# Altium PCB 24VRegulator.PcbDoc
Units mil, origin at the board's own origin, x right, y up, seen from the top; angles counter-clockwise.
Board outline 5100 x 2270 mil, 2 copper layers (Top Layer, Bottom Layer); 10 components, 7 nets, 37 pads, 4 vias.
Unrouted connection lines stored in the file: 5.
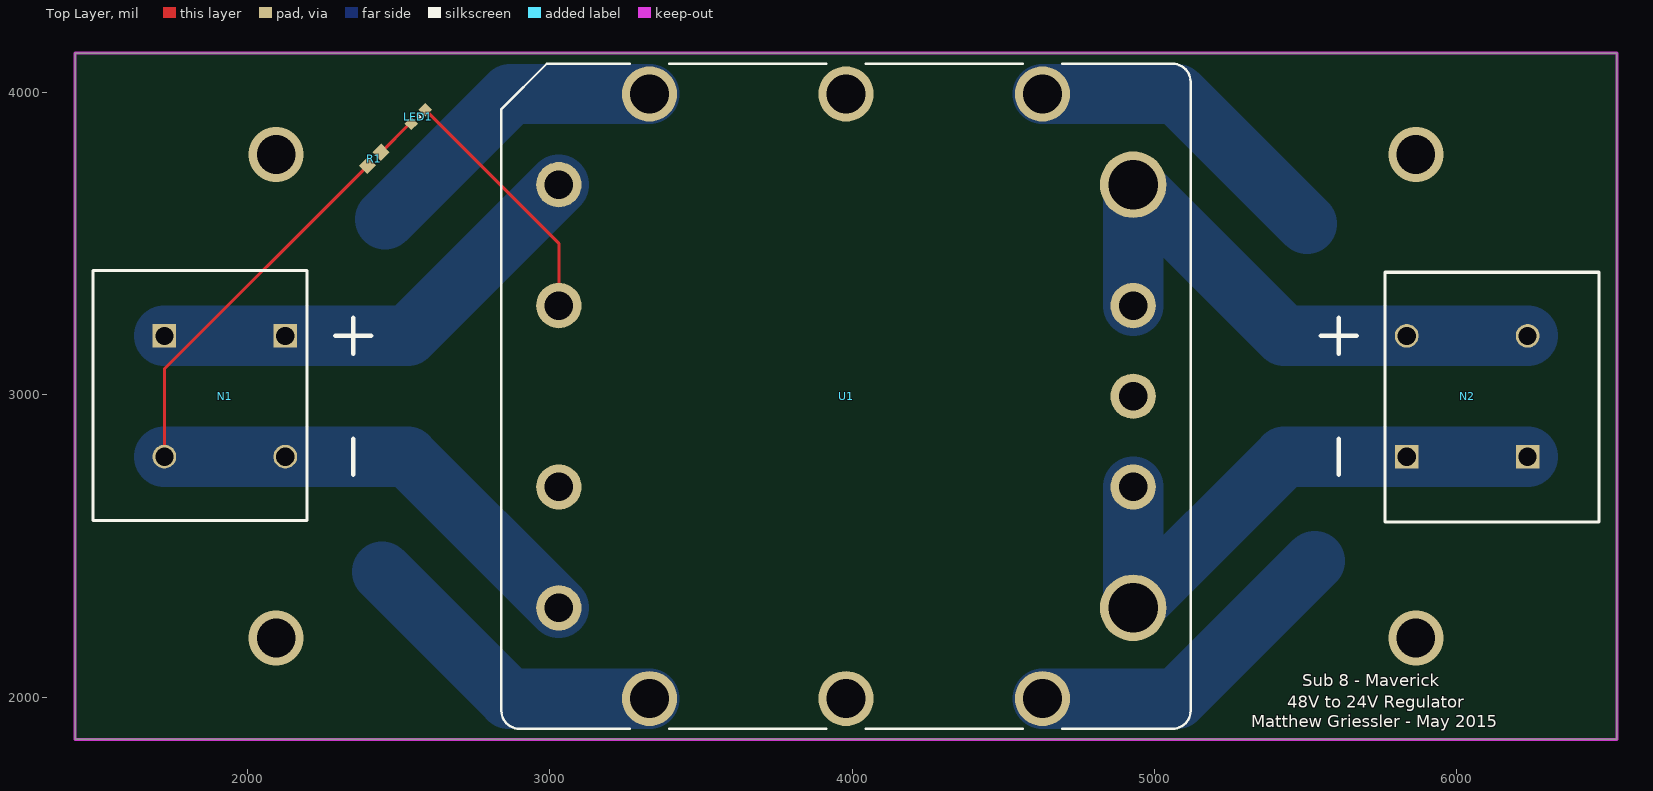
[diagram p0: Top Layer view]
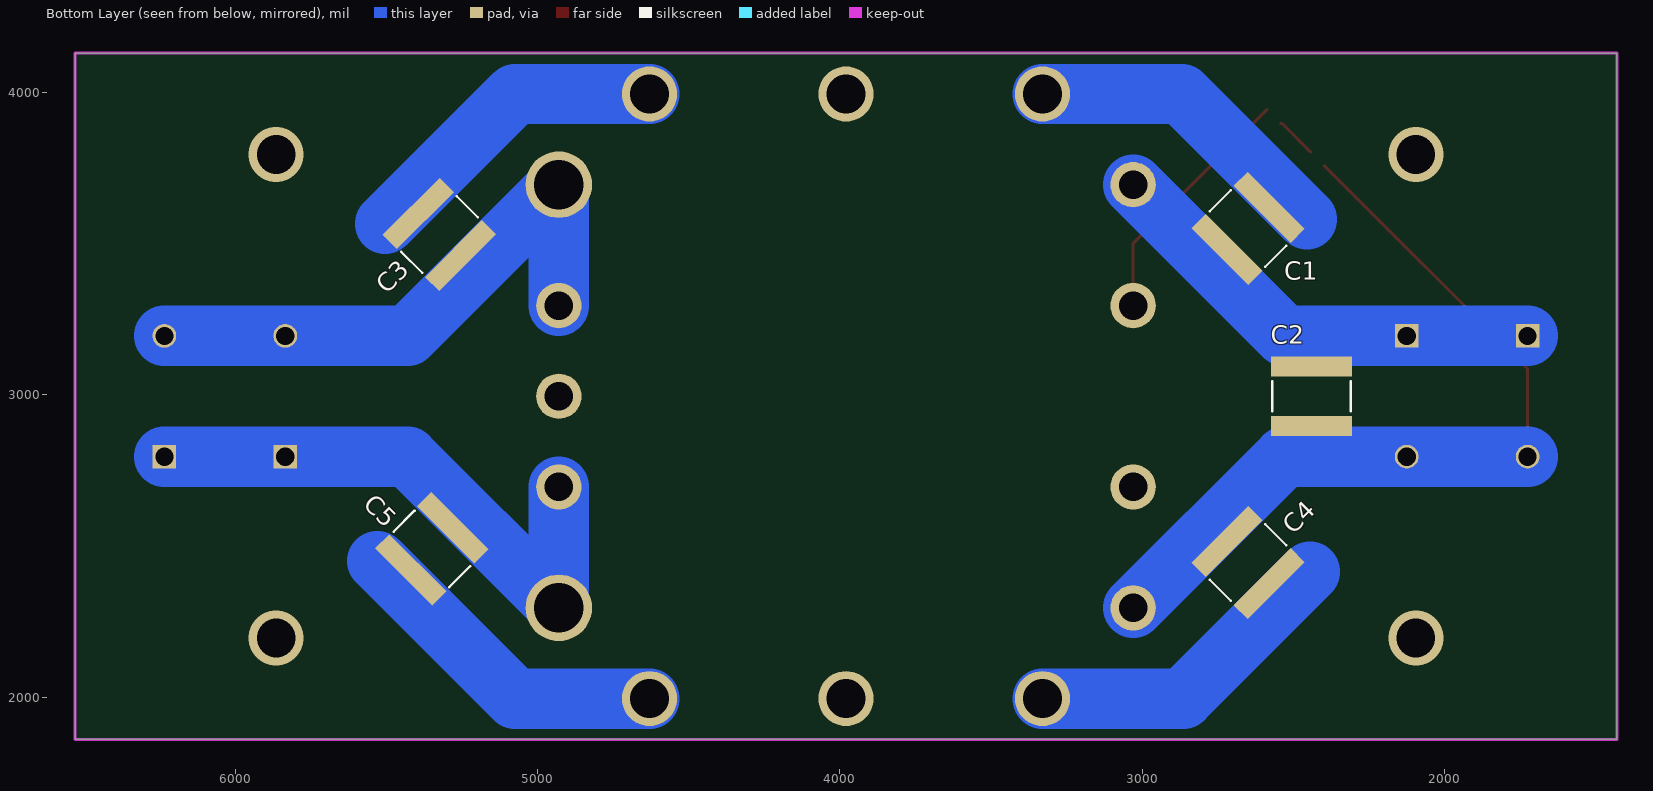
[diagram p1: Bottom Layer view, seen from below]
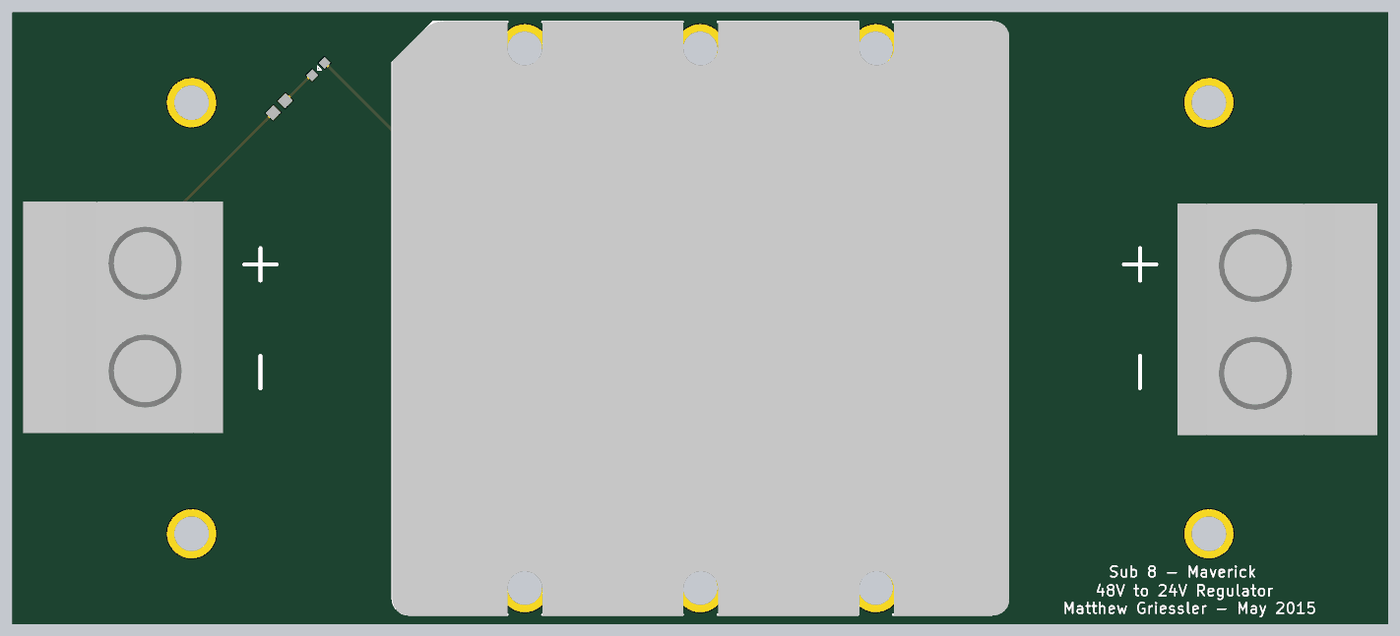
[diagram p2: 3D render of the assembled board from above, using the file's embedded part models]

## Layer stack, top to bottom
Top Solder: solder mask 0.4, Solder Resist, Dk 3.5
Top Layer: signal copper 1.4
Dielectric 1: dielectric 12.6, FR-4, Dk 4.8
Bottom Layer: signal copper 1.4
Bottom Solder: solder mask 0.4, Solder Resist, Dk 3.5

## Board outline
1430,1860 6530,1860 6530,4130 1430,4130

## Design rules (kind name [scope] priority, off if disabled: settings)
Clearance [All] p1: gap=10
Height [All] p1: minheight=0 maxheight=10000 prefheight=500
HoleSize [All] p1: absolutevalues=TRUE maxlimit=300 minlimit=1 maxpercent=80.000 minpercent=20.000
PolygonConnect [All] p1: connectstyle=Relief reliefconductorwidth=10 reliefentries=4 polygonreliefangle="90 Angle" airgapwidth=10
RoutingVias [All] p1: holewidth=28 width=50 viastyle="Through Hole" minholewidth=28 minwidth=50 maxholewidth=28 maxwidth=50
SilkToSolderMaskClearance [IsPad] p1: minsilkscreentomaskgap=5 clearancetoexposedcopper=TRUE
SolderMaskExpansion [All] p1: expansion=4
Width [All] p1: maxlimit=200 minlimit=10 preferedwidth=10
27 further rules are at their usual default settings.

## Components (designator, comment, footprint, x,y, rotation, side; value= is the part's Value field where it differs from the comment)
C1 "Cap" CAP2225 2650,3550 r135 bottom
C2 "Cap" CAP2225 2440,2995 r270 bottom
C3 "Cap" CAP2225 5325,3530 r45 bottom
C4 "Cap" CAP2225 2650,2445 r225 bottom
C5 "Cap" CAP2225 5350,2490 r315 bottom
LED1 "LED" LED0603 2565,3920 r225 top
N1 "0399700102" MOLEX-TERMINAL-1X2-EUROSTYLE-60A 1725,3195 r270 top
N2 "0399700102" MOLEX-TERMINAL-1x2-EUROSTYLE-60A_Reversed 6235,2795 r90 top
R1 "Res" RES0603 2420,3780 r225 top
U1 "48V->24V" FASTRAK_MINI_ONBOARD_MOUNT 3980,2995 r0 top

## Footprints (in the part's own frame and the unit in brackets; to place one, negate y for a bottom-side part, rotate by r counter-clockwise, add the part's x,y. Pads: shape width x height; smd on the part's side, far side on the other; paste and mask are expansions set on the pad)
CAP2225 [mm] "Chip Capacitor, 2-Leads, Body 5.60x6.40mm, IPC Medium Density"
  rect 1.7x6.8 smd: 1(-2.5,0) 2(2.5,0)
  silkscreen extent -1.25,-3.3 1.25,3.3, body extent -3,-3.4 3,3.4, height 1.8
FASTRAK_MINI_ONBOARD_MOUNT [mil]
  round 182 hole 128.5: 0(-650,-1000) 0(-650,1000) 0(0,-1000) 0(0,1000) 0(650,-1000) 0(650,1000)
  round 150 hole 94: 1(-950,700) 2(-950,300) 3(-950,-300) 4(-950,-700) 6(950,-300) 7(950,0) 8(950,300)
  round 220 hole 164: 5(950,-700) 9(950,700)
  silkscreen extent -1140,-1100 1140,1100, body extent -1141,-1103 1145,1103, height 434
LED0603 [mm] "Chip LED, 2-Leads, Body 1.60x0.80mm, IPC Medium Density"
  rect 0.8x0.8 smd: A(-0.825,0) C(0.825,0)
  silkscreen extent -0.13,-0.25 0.12,0.25, body extent -0.88,-0.48 0.88,0.47, height 0.8
MOLEX-TERMINAL-1X2-EUROSTYLE-60A [mm]
  rect 2x2 hole 1.52: 1(0,10.16) 1(0,0)
  round 2 hole 1.52: 2(10.16,10.16) 2(10.16,0)
  silkscreen extent -5.5,-6 15.5,17.37, body extent -5.95,-6.44 15.9,12.35, height 29.72
MOLEX-TERMINAL-1x2-EUROSTYLE-60A_Reversed [mm]
  rect 2x2 hole 1.52: 1(0,10.16) 1(0,0)
  round 2 hole 1.52: 2(10.16,0) 2(10.16,10.16)
  silkscreen extent -5.5,-6 15.5,17.37, body extent -5.95,-6.44 15.9,12.35, height 29.72
RES0603 [mm] "Chip Resistor, 2-Leads, Body 1.60x0.80mm, IPC Medium Density"
  rect 1.05x1 smd: 1(-0.8,0) 2(0.8,0)
  body extent -0.88,-0.48 0.88,0.47, height 0.8

## Part data
N1 N2: library part MOLEX-TERMINAL-1x2-EUROSTYLE-60A, "Giant 60A two position screw terminal"
U1: library part V48B24C250BL, "CONVERTER MOD DC/DC 24V 250W"

## Via types
v1: diameter 182, hole 128.5, Top Layer to Bottom Layer, 4 vias

## Nets (pads, with @x,y where several pads share a name; then routed paths per layer and width w, separated by ;. In a path a pad name is that pad's centre, name@x,y a point inside that pad or via, vN(x,y) a via of type N, cw(c..) or ccw(c..) an arc to the next point about the centre after c; other vN are vias at no path point)
24GND: C5.1 N2.1 U1.5 U1.6 | length 1912.1
  Bottom Layer w200: U1.6 U1.5 5430,2795 5835,2795 N2.1@6235,2795
24V: C3.1 N2.2 U1.8 U1.9 | length 1912.1
  Bottom Layer w200: U1.8 U1.9 5430,3195 5835,3195 N2.2@6235,3195
48GND: C2.2 C4.1 N1.2 R1.2 U1.4 | length 2753.5
  Top Layer w10: N1.2@1725,2795 1725,3085 R1.2
  Bottom Layer w200: N1.2@1725,2795 2125,2795 2530,2795 U1.4
48V: C1.1 C2.1 N1.1 U1.1 | length 1512.1
  Bottom Layer w200: N1.1@1725,3195 2125,3195 2530,3195 U1.1
NetC1_2: C1.2 C3.2 C4.2 C5.2 U1.0 | length 4247.4
  Bottom Layer w200: 2445,2415 2865,1995 U1.0@3330,1995 ; 2455,3580 2870,3995 U1.0@3330,3995 ; U1.0@4630,1995 5075,1995 5530,2450 ; U1.0@4630,3995 5075,3995 5505,3565
NetLED1_A: LED1.A U1.2 | length 831.1
  Top Layer w10: LED1.A 3030,3500.93 U1.2
NetLED1_C: LED1.C R1.1 | length 139
  Top Layer w10: R1.1 2537.03,3897.03 LED1.C
pads on no net: U1.3 U1.7
copper on no net:
  other v1: 2095,2195 5865,2195 2095,3795 5865,3795

## Keep-outs
Keep-Out Layer:
  the board outline again, w10

## Silkscreen, mask and mechanical layers (free items; w line width, h text height)
Top Overlay:
  text "Sub 8 - Maverick" at 5490,2035 h40
  text "48V to 24V Regulator" at 5440,1965 h40
  text "Matthew Griessler - May 2015" at 5320,1900 h40